# Altium PCB NanoEEG_v3.PcbDoc (part 1 of 2)
Units mm, origin at the board's own origin, x right, y up, seen from the top; angles counter-clockwise.
Board outline 66 x 52 mm, 4 copper layers (Top Layer, Gound Plane 1, Power Plane 1, Bottom Layer), stack 1.87 mm thick; 84 components, 86 nets, 411 pads, 232 vias.
Unrouted connection lines stored in the file: 20.
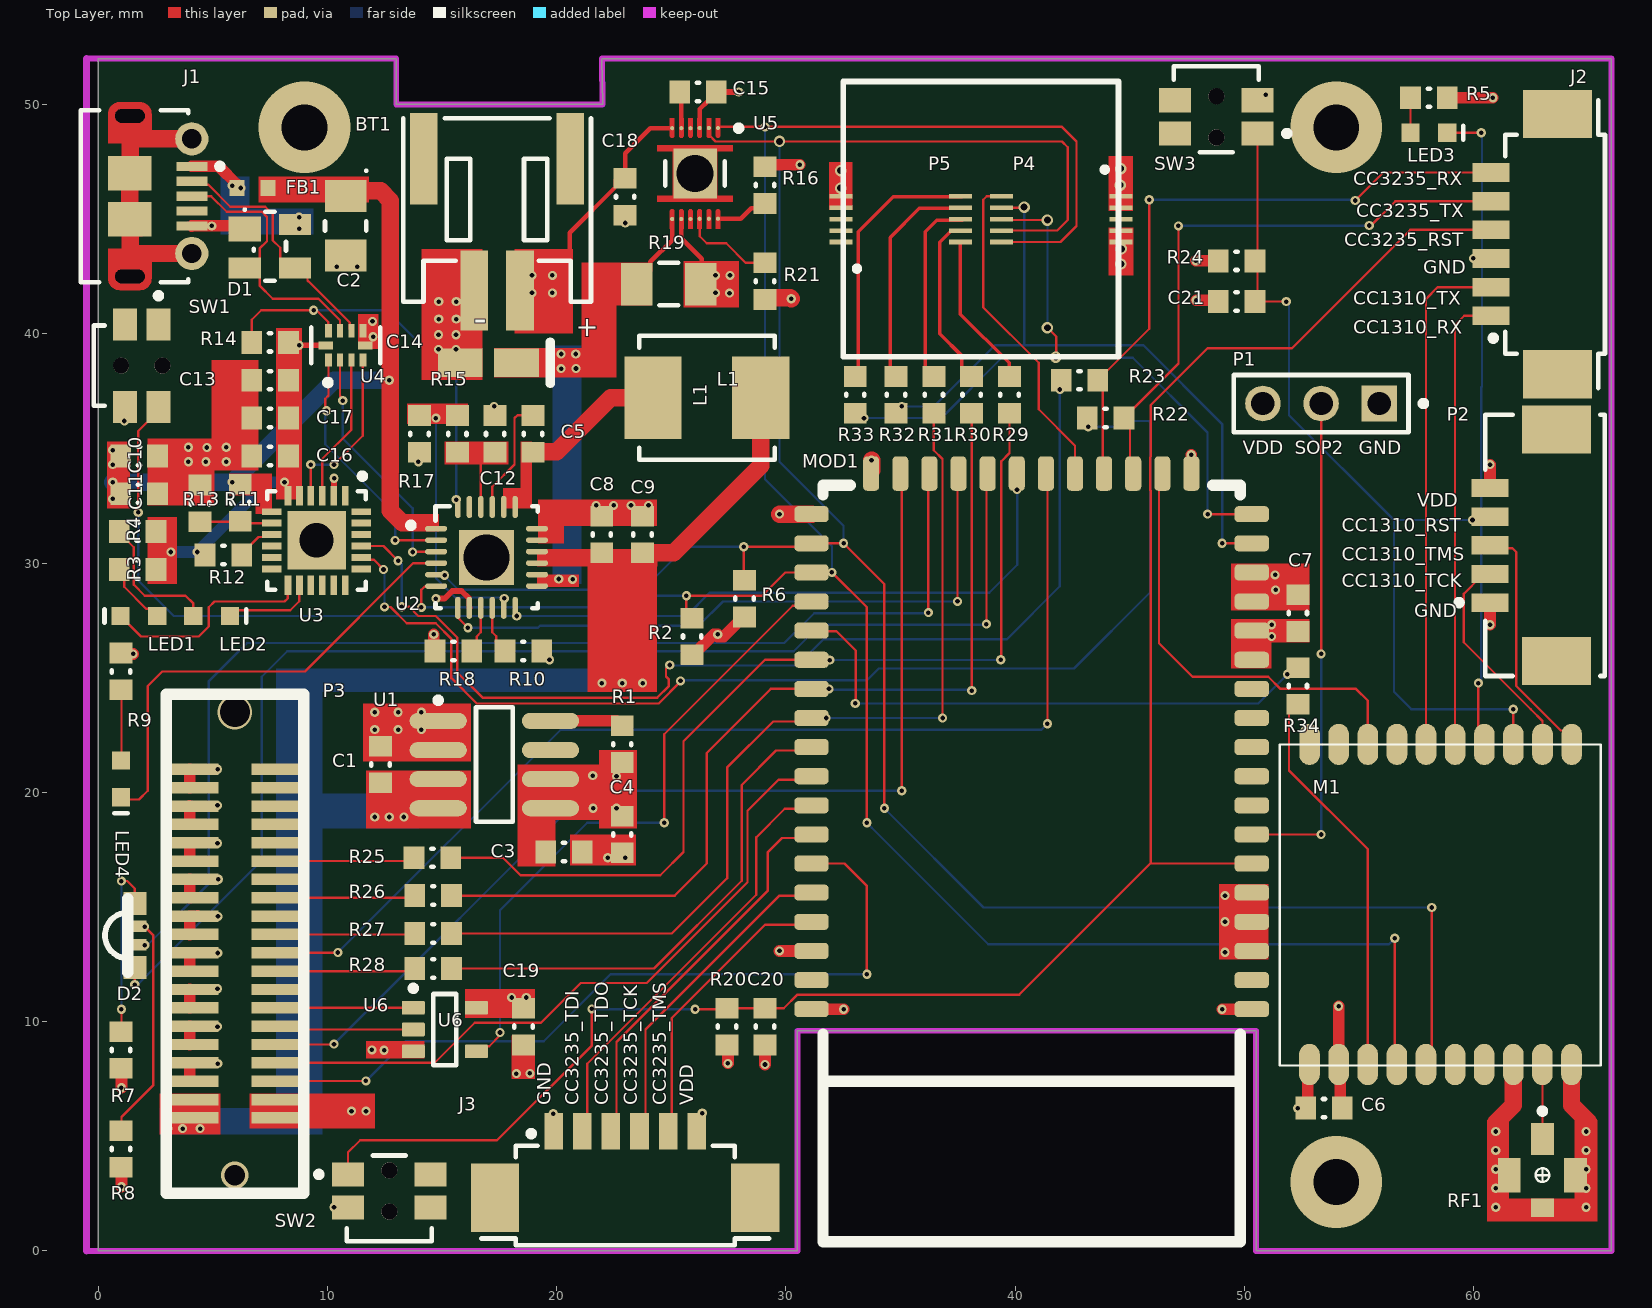
[diagram p0: Top Layer view]
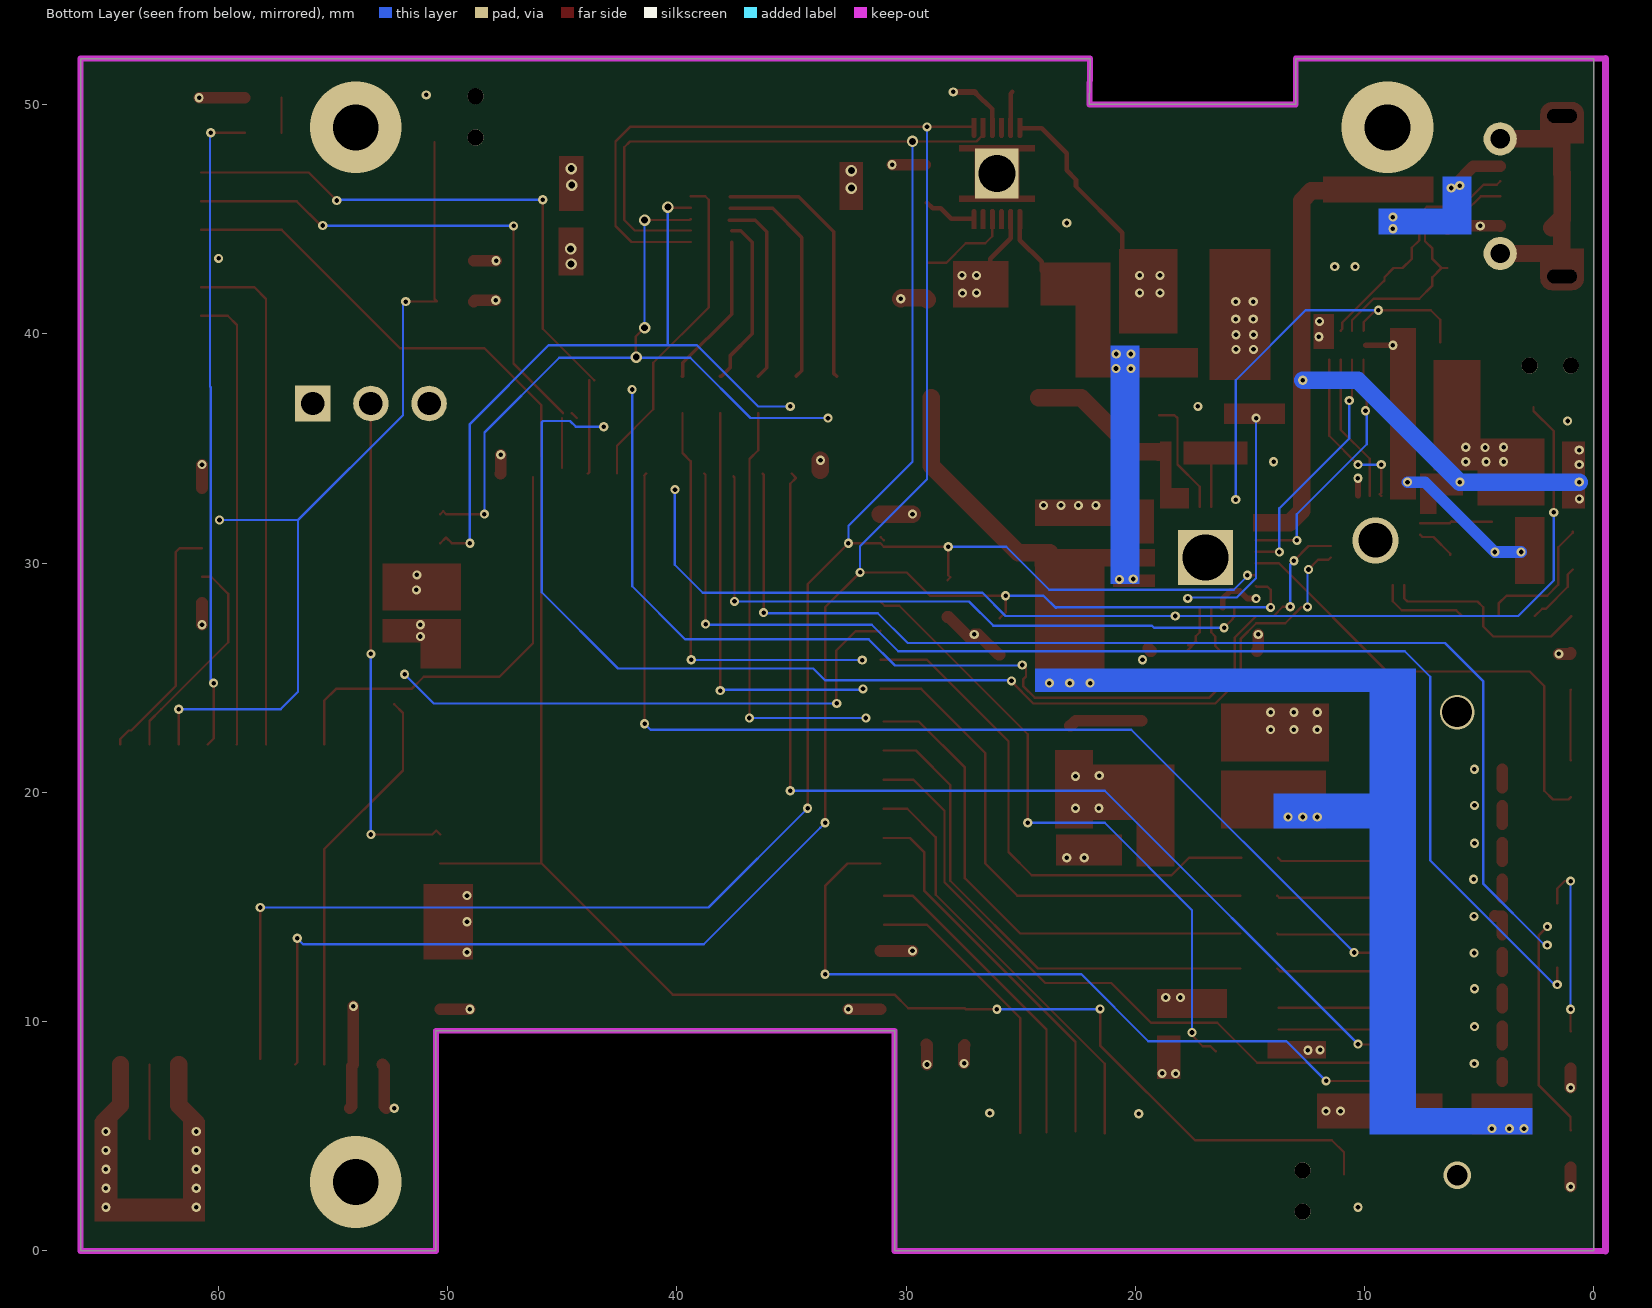
[diagram p1: Bottom Layer view, seen from below]
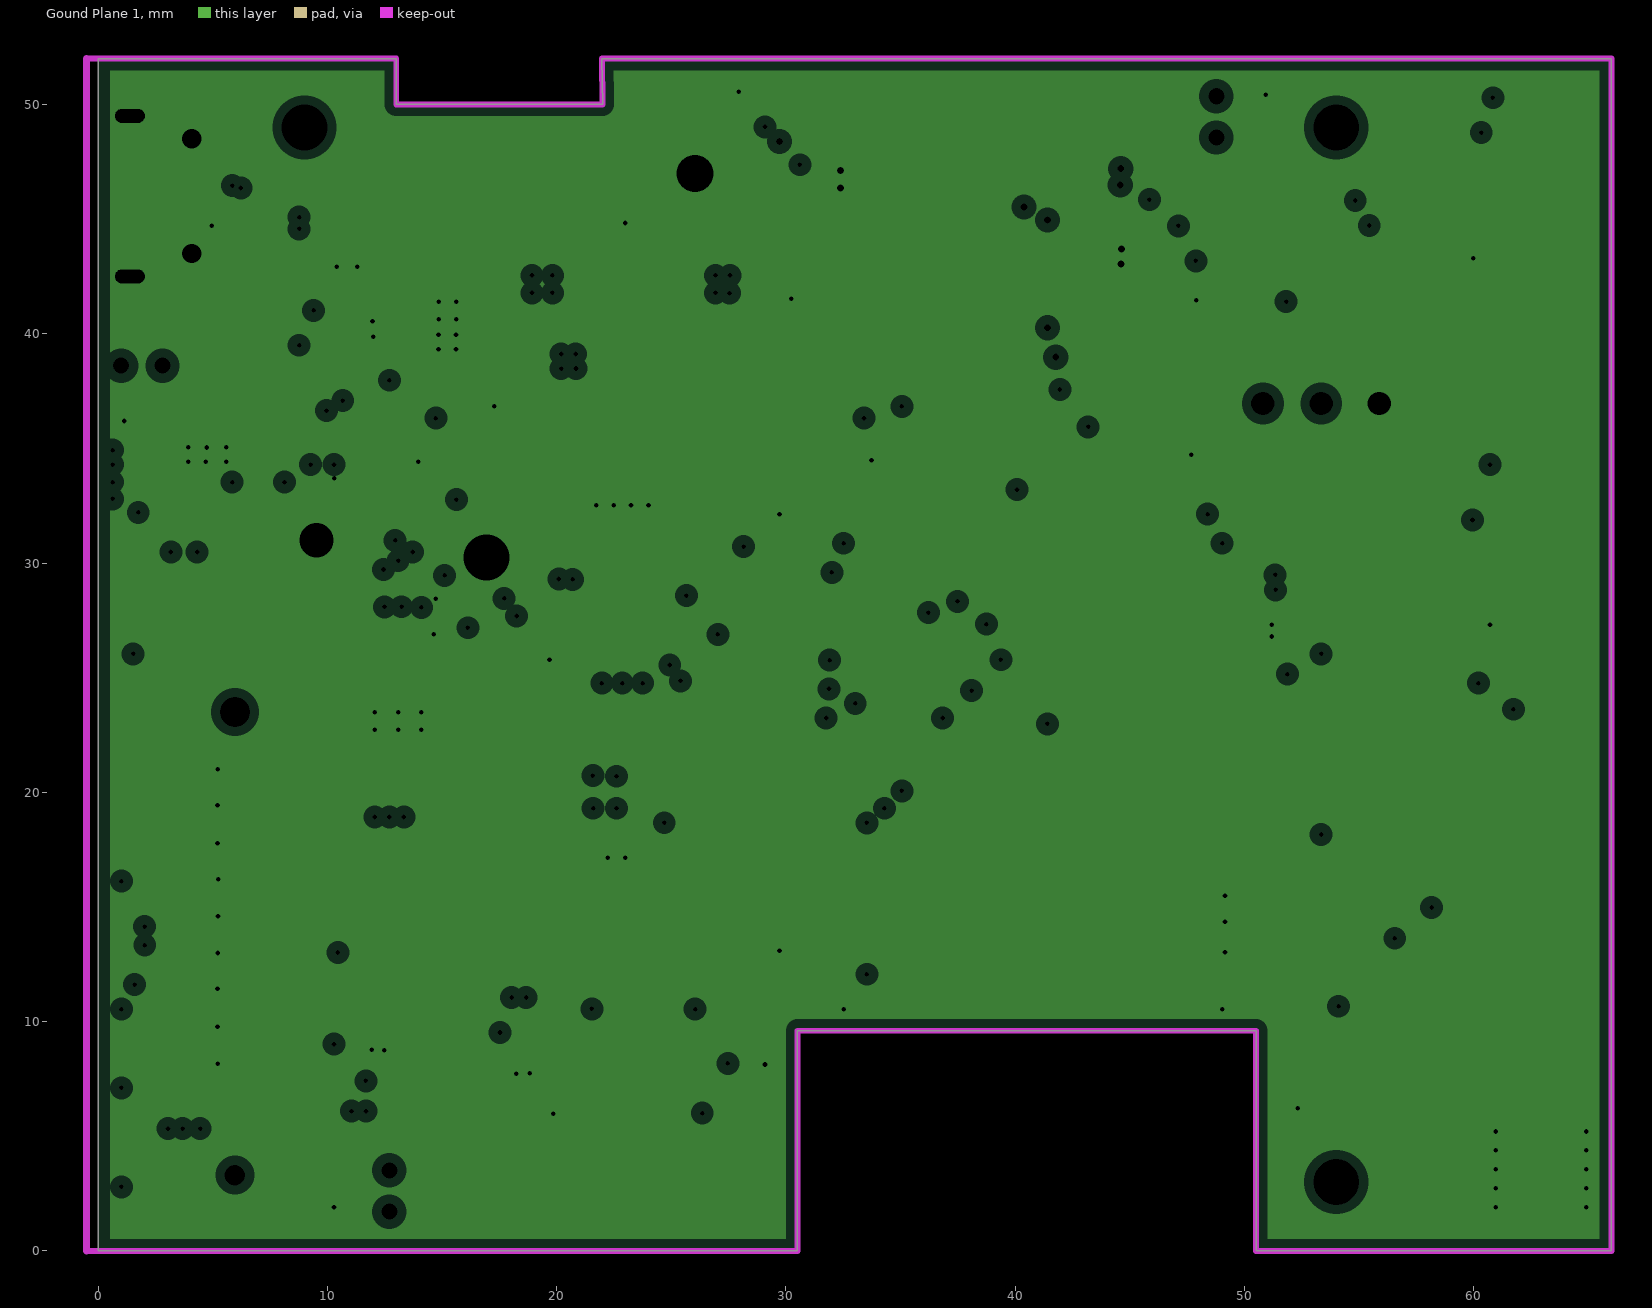
[diagram p2: Gound Plane 1, clearances drawn from the general rule]
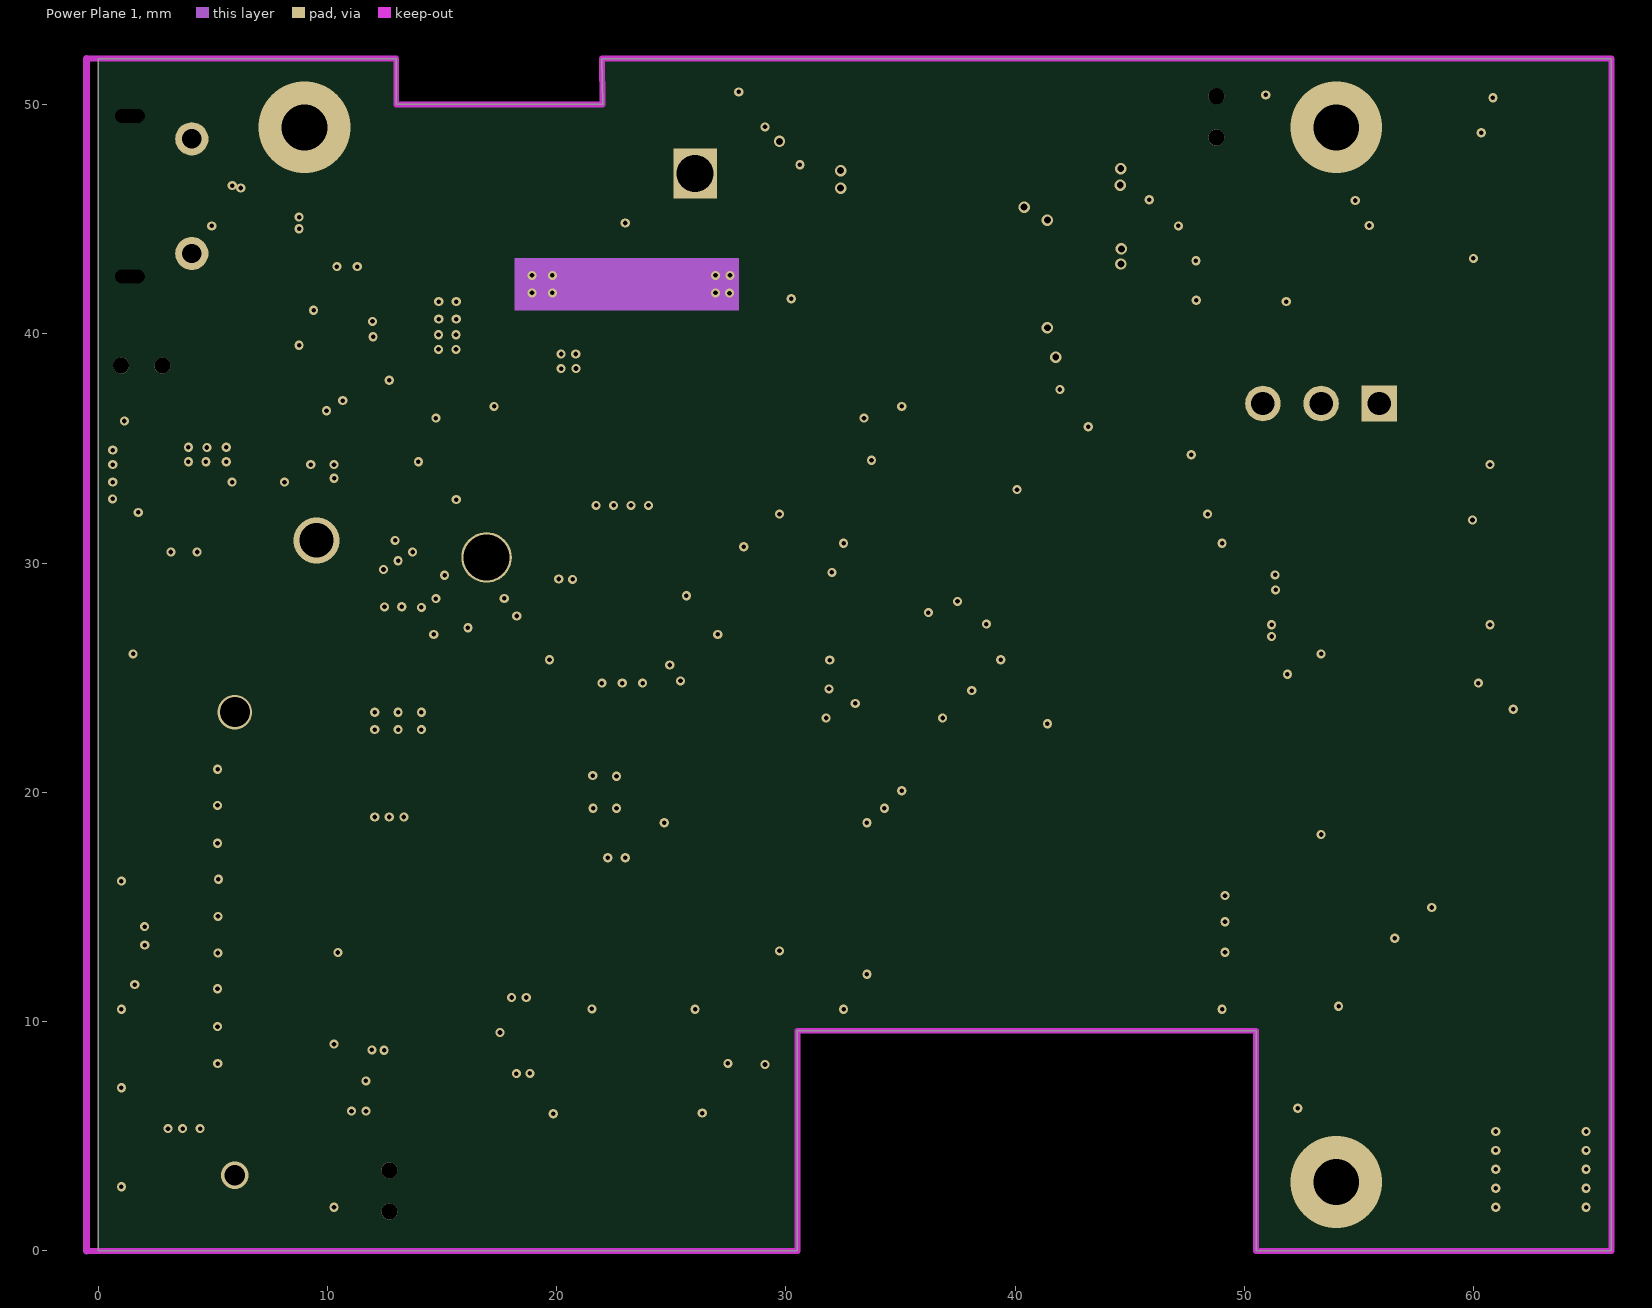
[diagram p3: Power Plane 1]

## Layer stack, top to bottom
Top Solder: solder mask 0.0102, Solder Resist, Dk 3.5
Top Layer: signal copper 0.0356
Dielectric 1: core 0.8, FR-4, Dk 4.8
Gound Plane 1: plane copper 0.036, net GND
Dielectric 3: prepreg 0.127, Dk 4.2
Power Plane 1: signal copper 0.036
Dielectric 2: core 0.8, FR-4, Dk 4.2
Bottom Layer: signal copper 0.0356
Bottom Solder: solder mask 0.0102, Solder Resist, Dk 3.5

## Board outline
0,0 0,52 13,52 13,50 22,50 21.971,52 42,52 66,52 66,0 50.5,0 50.5,9.6 30.5,9.6 30.5,0

## Design rules (kind name [scope] priority, off if disabled: settings)
Clearance [All] p1: gap=0.102 ignorepadtopadclearanceinfootprint=FALSE
HoleToHoleClearance [All] p1: gap=0 allowstackedmicrovias=TRUE
MinimumSolderMaskSliver [All] p1: minsoldermaskwidth=0
PlaneClearance [All] p1: clearance=0.4
PlaneConnect [All] p1: planeconnectstyle=Direct reliefexpansion=0.508 reliefentries=4 reliefconductorwidth=0.254 reliefairgap=0.254
PolygonConnect [All] p1: connectstyle=Relief reliefconductorwidth=0.254 reliefentries=4 polygonreliefangle="90 Angle" airgapwidth=0.254
RoutingVias [All] p1: holewidth=0.2 width=0.4 viastyle="Through Hole" minholewidth=0.2 minwidth=0.4 maxholewidth=0.2 maxwidth=0.4
SilkToSilkClearance [All] p1: silktosilkclearance=0
SilkToSolderMaskClearance [IsPad] p1: minsilkscreentomaskgap=0 clearancetoexposedcopper=TRUE
SolderMaskExpansion [All] p1: expansion=0.05 istentingtop=FALSE
UnRoutedNet [All] p1: checkbadconnections=TRUE
Width [InNetClass('SIGNAL')] p1: maxlimit=1.27 minlimit=0.09 preferedwidth=0.1
23 further rules are at their usual default settings.

## Components (designator, comment, footprint, x,y, rotation, side; value= is the part's Value field where it differs from the comment)
BT1 "Battery" PH2.0-WS-2P 17.399,47.625 r180 top
C1 "CAP 10uF 6.3V" CAPC0603(1608)100_N 12.319,21.209 r270 top value=10uF
C2 "TAJA106K016RNJ" CAPMP3217X18-T_V 10.795,44.704 r270 top
C3 "CAP 10uF 6.3V" CAPC0603(1608)100_N 20.32,17.399 r180 top value=10uF
C4 "CAP 100nF 6.3V" CAPC0603(1608)100_N 22.86,18.161 r90 top value=100nF
C5 "CAP 47nF" CAPC0603(1608)100_N 18.968,35.635 r270 top value=47nF
C6 "CAP 100nF 6.3V" CAPC0603(1608)100_N 53.467,6.223 r0 top value=100nF
C7 "CAP 100nF 6.3V" CAPC0603(1608)100_N 52.324,27.813 r90 top value=100nF
C8 "CAP 10uF" CAPC0603(1608)100_N 21.963,31.242 r270 top value=10uF
C9 "CAP 10uF" CAPC0603(1608)100_N 23.741,31.242 r270 top value=10uF
C10 "CAP 100nF 6.3V" CAPC0603(1608)100_N 1.786,34.671 r180 top value=100nF
C11 "CAP 4.7uF 6.3V" CAPC0603(1608)100_N 1.786,33.02 r180 top value=4.7uF
C12 "CAP 4.7uF 10V 0603(1608)" CAPC0603(1608)55_N 17.317,35.635 r90 top value=4.7uF
C13 "CAP 100nF 6.3V" CAPC0603(1608)100_N 7.501,37.973 r0 top value=100nF
C14 "T491A106K016AT" KEMT-A-3216-18-2_N 17.018,38.735 r180 top
C15 "CAP 470nF 10V" CAPC0603(1608)100_N 26.162,50.546 r180 top value=470nF
C16 "CAP 100nF 6.3V" CAPC0603(1608)100_N 7.501,34.671 r0 top value=100nF
C17 "CAP 4.7uF 6.3V" CAPC0603(1608)100_N 7.501,36.322 r0 top value=4.7uF
C18 "CAP 10uF 10V" CAPC0603(1608)100_N 22.987,45.974 r90 top value=1uF
C19 "CAP 100nF 6.3V" CAPC0603(1608)100_N 18.55,9.779 r90 top value=100nF
C20 "CAP 10uF 25V" CAPC0603(1608)100_N 29.083,9.779 r90 top value=1uF
C21 "CAP 1uF 25V 0603(1608)" CAPC0603(1608)100_N 49.657,41.402 r0 top value=1uF
D1 "SP0503BAHTG" LFUS-SOT143-4_V 7.493,43.815 r0 top
D2 "Bi-Color LED" LED_Bi_Color_1204 1.3,13.758 r180 top
FB1 "BLM18PG600SN1J" MURA-BLM18PG_KG-CHIP-2_V2 6.731,46.355 r180 top
J1 "105017-0001" USB-MICRO-B_V 2.735,46 r270 top locked
J2 "Header 6" GH-1.25-WS-6P 63.546,43.908 r90 top
J3 "Header 6" GH-1.25-WS-6P 22.987,2.413 r0 top
L1 "ETQ-P3M2R2YFP" FP-PCC-M0530M-MFG 26.551,37.211 r0 top value=2.2uH
LED1 "150060BS75000" 0603_A 1.778,27.686 r0 top
LED2 "150060BS75000" 0603_A 4.953,27.686 r180 top
LED3 "150060BS75000" 0603_A 58.039,48.768 r180 top
LED4 "150060BS75000" 0603_A 1,20.59 r90 top
M1 "CC1310-Module (Silicontrac)" CC1310ZTR4-GC 65.54,8.143 r180 top
MOD1 "TA3235S_UA_MOD" TA_3235S_UA_MOD 49.815,32.131 r180 top
P1 "22-28-4033" MOLX-22-28-4033_V 53.34,36.957 r180 top
P2 "53261-0571" MOLX-52361-0571-5_V 60.706,30.774 r90 top
P3 "Header 20X2" FCI-B2B-0.8mm-40p-MALE 4,5.8 r270 top locked
P4 "5*2 母座" "10PIN 母座" 42,45 r270 top locked
P5 "5*2 母座" "10PIN 母座" 35,45 r90 top locked
R1 "249K 1%" RESC0603(1608)_N 22.86,22.098 r270 top value="249000.00 Ohm"
R2 "4K7 1% 0603(1608)" RESC0603(1608)_N 25.908,26.797 r90 top value="4700.00 Ohm"
R3 "1K 1%" RESC0603(1608)_N 1.722,29.718 r0 top value="1000.00 Ohm"
R4 "1K 1%" RESC0603(1608)_N 1.722,31.369 r0 top value="1000.00 Ohm"
R5 "1K 1%" RESC0603(1608)_N 58.039,50.292 r0 top value="1000.00 Ohm"
R6 "10K 1% 0603(1608)" RESC0603(1608)_N 28.194,28.448 r90 top value="4700.00 Ohm"
R7 "1K 1%" RESC0603(1608)_N 1,8.763 r90 top value="1000.00 Ohm"
R8 "1K 1%" RESC0603(1608)_N 1,4.445 r90 top value="1000.00 Ohm"
R9 "1K 1%" RESC0603(1608)_N 1,25.273 r90 top value="1000.00 Ohm"
R10 "260" RESC0603(1608)_N 18.542,26.162 r180 top value="10500.00 Ohm"
R11 "27K 1%" RESC0603(1608)_N 6.198,32.629 r270 top value="1000.00 Ohm"
R12 "2K 1%" RESC0603(1608)_N 5.461,30.353 r180 top value="1000.00 Ohm"
R13 "33K 1%" RESC0603(1608)_N 4.445,32.601 r90 top value="1000.00 Ohm"
R14 "1K 1%" RESC0603(1608)_N 7.501,39.624 r180 top value="1000.00 Ohm"
R15 "10K" RESC0603(1608)_N 15.666,35.635 r90 top value="10500.00 Ohm"
R16 "10K 1%" RESC0603(1608)_N 29.083,46.482 r270 top value="10000.00 Ohm"
R17 "10K" RESC0603(1608)_N 14.015,35.635 r270 top value="10500.00 Ohm"
R18 "10K" RESC0603(1608)_N 15.494,26.162 r180 top value="10500.00 Ohm"
R19 "WSLP1206R0100FEA" FP-WSLP1206-FP_1_65x1_93x-IPC_B 24.892,42.164 r180 top
R20 "100K 1%" RESC0603(1608)_N 27.432,9.779 r270 top value="10000.00 Ohm"
R21 "1K 1%" RESC0603(1608)_N 29.083,42.291 r270 top value="10000.00 Ohm"
R22 "Jumper" RESC0603(1608)_N 43.942,36.322 r180 top value="0.00 Ohm"
R23 "Jumper" RESC0603(1608)_N 42.799,37.973 r180 top value="0.00 Ohm"
R24 "10K 1% 0603(1608)" RESC0603(1608)_N 49.657,43.18 r180 top value="10000.00 Ohm"
R25 "100R 1%" RESC0603(1608)_N 14.575,17.145 r180 top value="100.00 Ohm"
R26 "100R 1%" RESC0603(1608)_N 14.613,15.494 r180 top value="100.00 Ohm"
R27 "100R 1%" RESC0603(1608)_N 14.613,13.843 r180 top value="100.00 Ohm"
R28 "100R 1%" RESC0603(1608)_N 14.613,12.319 r180 top value="100.00 Ohm"
R29 "100R 1%" RESC0603(1608)_N 39.751,37.338 r270 top value="100.00 Ohm"
R30 "100R 1%" RESC0603(1608)_N 38.1,37.338 r270 top value="100.00 Ohm"
R31 "100R 1%" RESC0603(1608)_N 36.449,37.338 r270 top value="100.00 Ohm"
R32 "100R 1%" RESC0603(1608)_N 34.798,37.338 r270 top value="100.00 Ohm"
R33 "100R 1%" RESC0603(1608)_N 33.02,37.338 r270 top value="100.00 Ohm"
R34 "100K" RESC0603(1608)_N 52.324,24.638 r90 top value="10500.00 Ohm"
RF1 "RECE-20369-001E-01" IPEX_MHF_I 62.992,3.302 r180 top
SW1 "EVQ-P7D01K" FP-EVQ-P7D01K-MFG 1.905,38.608 r270 top
SW2 "EVQ-P7D01P" FP-EVQ-P7D01P-MFG 12.7,2.286 r0 top
SW3 "EVQ-P7D01P" FP-EVQ-P7D01P-MFG 48.768,49.784 r180 top
U1 "TPS76833QDG4" TI-D8_M 17.28,21.209 r0 top locked
U2 "BQ25895RTWR" RTW0024H 16.94,30.246 r0 top value=Value
U3 "CP2102N-A01-GQFN24" SLAB-QFN-24-2550x2550TP_A_V 9.525,30.988 r270 top
U4 "TS3USB3000RSER" FP-TS3USB3000RSER-MFG 10.795,39.497 r90 top
U5 "BQ27441DRZR-G1A" FP-DRZ0012A-MFG_M 26.035,46.99 r180 top
U6 "SN74AHC1G32DBVR" DBV0005A_N 15.121,9.652 r0 top

## Footprints (in the part's own frame and the unit in brackets; to place one, negate y for a bottom-side part, rotate by r counter-clockwise, add the part's x,y. Pads: shape width x height; smd on the part's side, far side on the other; paste and mask are expansions set on the pad)
"10PIN 母座" [mm] "0.5间距，合高1.5，2.5，3.5"
  rect 0.2x1 smd: 1(-1,2.605) 2(-0.5,2.605) 3(0,2.605) 4(0.5,2.605) 5(1,2.605) 6(-1,-2.605) 7(-0.5,-2.605) 8(0,-2.605) 9(0.5,-2.605) 10(1,-2.605)
  silkscreen extent -2.26,1.81 -2.06,2
0603_A [mm] "Chip LED, 2-Leads, Body 1.6x0.8mm, IPC Medium Density"
  rect 0.8x0.8 smd: 1(-0.8,0) 2(0.8,0)
  silkscreen extent -1.5,-0.3 -1.5,0.3, body extent -0.8,-0.4 0.8,0.4, height 0.7
CAPC0603(1608)55_N [mm] "Chip Capacitor, Body 1.6x0.8mm, Height 0.55mm, IPC Medium Density"
  rect 0.9x1 smd: 1(-0.8,0) 2(0.8,0)
  silkscreen extent -0.05,-0.4 0.05,0.4, body extent -0.87,-0.48 0.88,0.47, height 0.55
CAPC0603(1608)100_N [mm] "Chip Capacitor, Body 1.6x0.8mm, Height 1.0mm, IPC Medium Density"
  rect 0.9x1 smd: 1(-0.8,0) 2(0.8,0)
  silkscreen extent -0.05,-0.4 0.05,0.4, body extent -0.87,-0.48 0.88,0.47, height 1
CAPMP3217X18-T_V [mm] "Molded Capacitor, 2-Leads, Body 3.40x1.8mm"
  rect 1.4x1.8 smd: 1(-1.3,0) 2(1.3,0)
  silkscreen extent -2.45,-0.9 0.2,0.95, body extent -1.92,-0.9 1.92,0.9, height 1.8
CC1310ZTR4-GC [mm]
  oval 0.9x1.8 smd: 1(1.27,-13.945) 2(2.544,-13.945) 3(3.814,-13.945) 4(5.084,-13.945) 5(6.354,-13.945) 6(7.624,-13.945) 7(8.894,-13.945) 8(10.164,-13.945) 9(11.434,-13.945) 10(12.704,-13.945) 11(12.708,0.015) 12(11.438,0.015) 13(10.168,0.015) 14(8.898,0.015) 15(7.628,0.015) 16(6.358,0.015) 17(5.088,0.015) 18(3.818,0.015) 19(2.548,0.015) 20(1.28,0.015)
  silkscreen extent 0,-13.94 14,0.06
DBV0005A_N [mm] "SOT23, 5-Leads, Body 3.05x1.75mm, Pitch 0.95mm, IPC Medium Density"
  rrect17% 1x0.6 smd: 1(-1.375,0.95) 2(-1.375,0) 3(-1.375,-0.95) 4(1.375,-0.95) 5(1.375,0.95)
  silkscreen extent -1.5,-1.55 0.5,1.92, body extent -1.42,-1.46 1.42,1.46, height 1.08
FCI-B2B-0.8mm-40p-MALE [mm]
  rect 0.5x2.5 smd: 1(0,0) 1(0,0) 2(0,3.93) 2(0,3.93) 3(-0.8,0) 4(-0.8,3.93) 5(-1.6,0) 6(-1.6,3.93) 7(-2.4,0) 8(-2.4,3.93) 9(-3.2,0) 10(-3.2,3.93) 11(-4,0) 12(-4,3.93) 13(-4.8,0) 14(-4.8,3.93) 15(-5.6,0) 16(-5.6,3.93) 17(-6.4,0) 18(-6.4,3.93) 19(-7.2,0) 20(-7.2,3.93) 21(-8,0) 22(-8,3.93) 23(-8.8,0) 24(-8.8,3.93) 25(-9.6,0) 26(-9.6,3.93) 27(-10.4,0) 28(-10.4,3.93) 29(-11.2,0) 30(-11.2,3.93) 31(-12,0) 32(-12,3.93) 33(-12.8,0) 34(-12.8,3.93) 35(-13.6,0) 36(-13.6,3.93) 37(-14.4,0) 38(-14.4,3.93) 39(-15.2,0) 40(-15.2,3.93)
  silkscreen extent -18.48,-1.03 3.28,4.96, body extent -18.5,-1.03 3.3,4.96, height 5.6
FP-DRZ0012A-MFG_M [mm]
  round 0.18 smd paste-1000 mask+0: 1(-1,-1.985) 2(-0.6,-1.985) 3(-0.2,-1.985) 4(0.2,-1.975) 5(0.6,-1.975) 6(1,-1.975) 7(1,1.985) 8(0.6,1.985) 9(0.2,1.985) 10(-0.2,1.975) 11(-0.6,1.975) 12(-1,1.975)
  rect 1.9x2.2 hole 1.6: 13(0,0)
  Top Layer region: -0.9,2.4 -0.9,1.65 -0.9,1.63 -0.915,1.593 -0.943,1.565 -0.98,1.55 -1,1.55 -1.02,1.55 -1.057,1.565 -1.085,1.593 -1.1,1.63 -1.1,1.65 -1.1,1.65 -1.1,2.4
  Top Layer region: -0.5,2.4 -0.5,1.65 -0.5,1.63 -0.515,1.593 -0.543,1.565 -0.58,1.55 -0.6,1.55 -0.62,1.55 -0.657,1.565 -0.685,1.593 -0.7,1.63 -0.7,1.65 -0.7,1.65 -0.7,2.4
  Top Layer region: -0.1,2.4 -0.1,1.65 -0.1,1.63 -0.115,1.593 -0.143,1.565 -0.18,1.55 -0.2,1.55 -0.22,1.55 -0.257,1.565 -0.285,1.593 -0.3,1.63 -0.3,1.65 -0.3,1.65 -0.3,2.4
  Top Layer region: 0.3,2.4 0.3,1.65 0.3,1.63 0.285,1.593 0.257,1.565 0.22,1.55 0.2,1.55 0.18,1.55 0.143,1.565 0.115,1.593 0.1,1.63 0.1,1.65 0.1,1.65 0.1,2.4
  Top Layer region: 0.7,2.4 0.7,1.65 0.7,1.63 0.685,1.593 0.657,1.565 0.62,1.55 0.6,1.55 0.58,1.55 0.543,1.565 0.515,1.593 0.5,1.63 0.5,1.65 0.5,1.65 0.5,2.4
  Top Layer region: 1.1,2.4 1.1,1.65 1.1,1.63 1.085,1.593 1.057,1.565 1.02,1.55 1,1.55 0.98,1.55 0.943,1.565 0.915,1.593 0.9,1.63 0.9,1.65 0.9,1.65 0.9,2.4
  Top Layer region: 0.9,-2.4 0.9,-1.65 0.9,-1.63 0.915,-1.593 0.943,-1.565 0.98,-1.55 1,-1.55 1.02,-1.55 1.057,-1.565 1.085,-1.593 1.1,-1.63 1.1,-1.65 1.1,-1.65 1.1,-2.4
  Top Layer region: 0.5,-2.4 0.5,-1.65 0.5,-1.63 0.515,-1.593 0.543,-1.565 0.58,-1.55 0.6,-1.55 0.62,-1.55 0.657,-1.565 0.685,-1.593 0.7,-1.63 0.7,-1.65 0.7,-1.65 0.7,-2.4
  Top Layer region: 0.1,-2.4 0.1,-1.65 0.1,-1.63 0.115,-1.593 0.143,-1.565 0.18,-1.55 0.2,-1.55 0.22,-1.55 0.257,-1.565 0.285,-1.593 0.3,-1.63 0.3,-1.65 0.3,-1.65 0.3,-2.4
  Top Layer region: -0.3,-2.4 -0.3,-1.65 -0.3,-1.63 -0.285,-1.593 -0.257,-1.565 -0.22,-1.55 -0.2,-1.55 -0.18,-1.55 -0.143,-1.565 -0.115,-1.593 -0.1,-1.63 -0.1,-1.65 -0.1,-1.65 -0.1,-2.4
  Top Layer region: -0.7,-2.4 -0.7,-1.65 -0.7,-1.63 -0.685,-1.593 -0.657,-1.565 -0.62,-1.55 -0.6,-1.55 -0.58,-1.55 -0.543,-1.565 -0.515,-1.593 -0.5,-1.63 -0.5,-1.65 -0.5,-1.65 -0.5,-2.4
  Top Layer region: -1.1,-2.4 -1.1,-1.65 -1.1,-1.63 -1.085,-1.593 -1.057,-1.565 -1.02,-1.55 -1,-1.55 -0.98,-1.55 -0.943,-1.565 -0.915,-1.593 -0.9,-1.63 -0.9,-1.65 -0.9,-1.65 -0.9,-2.4
  Top Layer region: -1.65,1.225 1.65,1.225 1.65,0.975 0.975,0.975 0.975,-0.975 1.65,-0.975 1.65,-1.225 -1.65,-1.225 -1.65,-0.975 -0.975,-0.975 -0.975,0.975 -1.65,0.975 -1.65,1.225
  silkscreen extent -2.02,-2.1 1.3,0.53, body extent -1.75,-2.5 1.75,2.5, height 0.25
FP-EVQ-P7D01K-MFG [mm]
  rect 1.4x1.05 smd paste+0 mask+0: 1(-1.8,0.725) 1'(1.8,0.725) 2(-1.8,-0.725) 2'(1.8,-0.725)
  round 0.7 hole 0.7 unplated paste-1000 mask+0: ""(0,0.9) ""(0,-0.9)
  silkscreen extent -3.17,-2.1 1.75,0.85, body extent -2.6,-2.2 2.6,1.55, height 0.25
FP-EVQ-P7D01P-MFG [mm]
  rect 1.4x1.05 smd paste+0 mask+0: 1(-1.8,1.05) 1'(1.8,1.05) 2(-1.8,-0.4) 2'(1.8,-0.4)
  round 0.7 hole 0.7 unplated: ""(0,-0.575) ""(0,1.225)
  silkscreen extent -3.2,-1.88 1.85,1.88, body extent -2.6,-1.97 2.6,1.97, height 0.25
FP-PCC-M0530M-MFG [mm]
  rect 2.5x3.6 smd paste+0 mask+0: 1(-2.35,0) 2(2.35,0)
  silkscreen extent -2.95,-2.7 2.95,2.7, body extent -3.7,-2.8 3.7,2.8, height 0.25
FP-TS3USB3000RSER-MFG [mm]
  rect 0.575x0.3 smd paste-1000 mask+0: 1(-0.637,0.75) 4(-0.637,-0.75) 6(0.637,-0.75) 9(0.637,0.75)
  rect 0.575x0.25 smd paste-1000 mask+0: 2(-0.637,0.25) 3(-0.637,-0.25) 7(0.637,-0.25) 8(0.637,0.25)
  rect 0.35x0.63 smd paste-1000 mask+0: 5(0,-0.86) 10(0,0.86)
  silkscreen extent -1.75,-1.5 0.77,1.5, body extent -1.02,-1.28 1.02,1.28, height 0.25
FP-WSLP1206-FP_1_65x1_93x-IPC_B [mm]
  rect 1.37x1.859 smd paste+0 mask+0: 1(-1.395,0) 2(1.395,0)
  silkscreen extent -0.41,-0.93 0.41,0.93, body extent -2.33,-1.18 2.33,1.18, height 0.25
GH-1.25-WS-6P [mm]
  rect 0.81x1.6 smd: 1(-3.125,2.8) 2(-1.875,2.8) 3(-0.625,2.8) 4(0.625,2.8) 5(1.875,2.8) 6(3.125,2.8)
  rect 2.1x3 smd: MP1(-5.675,-0.1) MP2(5.675,-0.1)
  silkscreen extent -6.27,-2.17 6.27,2.82, body extent -6.13,-2.1 6.13,3.3, height 3.4
IPEX_MHF_I [mm]
  rect 1x1.4 smd: 1(0,-1.575)
  rect 1x1.5 smd: 2(1.448,0) 3(-1.448,0)
  rect 1x0.8 smd: 4(0,1.422)
  silkscreen extent -0.3,-2.92 0.3,0.3, body extent -0.85,-0.85 0.85,0.85, height 0.85
KEMT-A-3216-18-2_N [mm] "Molded TAN Capacitor, 2-Leads, Body 3.4x1.8mm, IPC Medium Density"
  rect 1.95x1.25 smd: 1(-1.225,0) 2(1.225,0)
  silkscreen extent -2.7,-0.9 -2.7,0.9, body extent -1.7,-0.9 1.7,0.9, height 1.8
LED_Bi_Color_1204 [mm]
  rect 1x0.5 smd: 1(-0.3,0.4) 2(-0.3,-0.4)
  rect 1x1 smd: 3(-0.3,1.4) 4(-0.3,-1.4)
  silkscreen extent 0,-1.6 1,1.6, body extent -0.25,-1.6 1,1.6, height 1
LFUS-SOT143-4_V [mm] "SOT143, 4-Leads, Body 3.04x1.4mm, Pitch 1.90mm"
  rect 1.4x1.1 smd: 1(-1.1,0.75)
  rect 1.4x0.9 smd: 2(-1.1,-0.95) 3(1.1,-0.95) 4(1.1,0.95)
  silkscreen extent -1.15,-1.5 0.7,1.65, body extent -0.7,-1.52 0.7,1.52, height 1.22
MOLX-22-28-4033_V [mm] "THD, 3-Leads, Body 7.62x2.49mm, Pitch 2.54mm"
  rect 1.55x1.55 hole 1.02: 1(-2.54,0)
  round 1.55 hole 1.02: 2(0,0) 3(2.54,0)
  silkscreen extent -4.59,-1.24 3.81,1.24, body extent -3.81,-1.24 3.81,1.24, height 8.38
MOLX-52361-0571-5_V [mm] "SMD, 5-Leads, Body 11.4x5.2mm, Pitch 1.25mm"
  rect 0.8x1.6 smd: 1(-2.5,0) 2(-1.25,0) 3(0,0) 4(1.25,0) 5(2.5,0)
  rect 2.1x3 smd: MP1(-5.05,-2.9) MP2(5.05,-2.9)
  silkscreen extent -5.7,-5 5.7,1.47, body extent -5.7,-5 5.7,0.2, height 3.4
MURA-BLM18PG_KG-CHIP-2_V2 [mm] "Chip Ferrite Bead, 2-Leads, Body 1.6x0.8mm, Height 0.95mm, Reflow, 0.5 to 1.5A Rated Current"
  rect 0.65x0.7 smd: 1(-0.675,0) 2(0.675,0)
  body extent -0.8,-0.4 0.8,0.4, height 0.95
PH2.0-WS-2P [mm]
  rect 1.2x4 smd: 0(-3.2,-0.006) 0(3.2,-0.006)
  rect 1.2x3.5 smd: 1(-1,5.744) 2(1,5.744)
  silkscreen extent -4.1,-1.78 4.1,6.22, body extent -4,-1.65 4,6.95, height 5.55
RESC0603(1608)_N [mm] "Chip Resistor, Body 1.6x0.8mm, IPC Medium Density"
  rect 0.9x1 smd: 1(-0.8,0) 2(0.8,0)
  silkscreen extent -0.05,-0.4 0.05,0.4, body extent -0.85,-0.47 0.85,0.47, height 0.6
RTW0024H [mm]
  oval 0.965x0.24 smd paste+0 mask+0.051: 1(-2.2,1.25) 2(-2.2,0.75) 3(-2.2,0.25) 4(-2.2,-0.25) 5(-2.2,-0.75) 6(-2.2,-1.25) 13(2.2,-1.25) 14(2.2,-0.75) 15(2.2,-0.25) 16(2.2,0.25) 17(2.2,0.75) 18(2.2,1.25)
  oval 0.24x0.965 smd paste+0 mask+0.051: 7(-1.25,-2.2) 8(-0.75,-2.2) 9(-0.25,-2.2) 10(0.25,-2.2) 11(0.75,-2.2) 12(1.25,-2.2) 19(1.25,2.2) 20(0.75,2.2) 21(0.25,2.2) 22(-0.25,2.2) 23(-0.75,2.2) 24(-1.25,2.2)
  rect 2.4x2.4 smd paste-1.337 mask+0.051: 25(0,0)
  round 2.2 hole 2: 25(0,0)
  rect 2.4x2.4 smd far side paste-1.337 mask+0.051: 25(0,0)
  silkscreen extent -3.43,-2.22 2.22,2.22, body extent -1.84,-1.84 1.84,1.84, height 0.8
SLAB-QFN-24-2550x2550TP_A_V [mm]
  rect 0.85x0.3 smd: 1(-1.95,1.25) 2(-1.95,0.75) 3(-1.95,0.25) 4(-1.95,-0.25) 5(-1.95,-0.75) 6(-1.95,-1.25) 13(1.95,-1.25) 14(1.95,-0.75) 15(1.95,-0.25) 16(1.95,0.25) 17(1.95,0.75) 18(1.95,1.25)
  rect 0.3x0.85 smd: 7(-1.25,-1.95) 8(-0.75,-1.95) 9(-0.25,-1.95) 10(0.25,-1.95) 11(0.75,-1.95) 12(1.25,-1.95) 19(1.25,1.95) 20(0.75,1.95) 21(0.25,1.95) 22(-0.25,1.95) 23(-0.75,1.95) 24(-1.25,1.95)
  rect 2.55x2.55 smd: 25(0,0)
  silkscreen extent -2.92,-2.15 2.15,2.15, body extent -2,-2 2,2, height 0.8
TA_3235S_UA_MOD [mm]
  rrect50% 1.5x0.7 smd: 1(-0.5,21.59) 2(-0.5,20.32) 3(-0.5,19.05) 4(-0.5,17.78) 5(-0.5,16.51) 6(-0.5,15.24) 7(-0.5,13.97) 8(-0.5,12.7) 9(-0.5,11.43) 10(-0.5,10.16) 11(-0.5,8.89) 12(-0.5,7.62) 13(-0.5,6.35) 14(-0.5,5.08) 15(-0.5,3.81) 16(-0.5,2.54) 17(-0.5,1.27) 18(-0.5,0) 31(18.7,0) 32(18.7,1.27) 33(18.7,2.54) 34(18.7,3.81) 35(18.7,5.08) 36(18.7,6.35) 37(18.7,7.62) 38(18.7,8.89) 39(18.7,10.16) 40(18.7,11.43) 41(18.7,12.7) 42(18.7,13.97) 43(18.7,15.24) 44(18.7,16.51) 45(18.7,17.78) 46(18.7,19.05) 47(18.7,20.32) 48(18.7,21.59)
  rrect50% 0.7x1.5 smd: 19(2.13,-1.77) 20(3.4,-1.77) 21(4.67,-1.77) 22(5.94,-1.77) 23(7.21,-1.77) 24(8.48,-1.77) 25(9.75,-1.77) 26(11.02,-1.77) 27(12.29,-1.77) 28(13.56,-1.77) 29(14.83,-1.77) 30(16.1,-1.77)
  silkscreen extent 0,-1.27 18.2,31.73
TI-D8_M [mm] "SOIC, 8-Leads, Body 4.9x3.9mm, Pitch 1.27mm, IPC Low Density"
  oval 2.5x0.7 smd: 1(-2.45,1.905) 2(-2.45,0.635) 3(-2.45,-0.635) 4(-2.45,-1.905) 5(2.45,-1.905) 6(2.45,-0.635) 7(2.45,0.635) 8(2.45,1.905)
  silkscreen extent -2.57,-2.5 0.8,2.93, body extent -2,-2.5 2,2.5, height 1.75
USB-MICRO-B_V [mm] "USB, MICRO B, Body 7.491x4.695 mm, Pitch 0.65 mm"
  rect 0.4x1.35 smd: 1(-1.3,1.35) 2(-0.65,1.35) 3(0,1.35) 4(0.65,1.35) 5(1.3,1.35)
  round 1.45 hole 0.85: 6(-2.5,1.35) 7(2.5,1.35)
  rrect50% 0x0 hole 0.6 slot 1.3 at 90 deg: 8(-3.5,-1.35) 11(3.5,-1.35)
  rect 1.5x1.9 smd: 9(-1,-1.35) 10(1,-1.35)
  Top Layer circle w0.5: c-3.6,-1.8 r0.25
  Top Layer circle w0.5: c-3.6,-0.9 r0.25
  Top Layer circle w0.5: c3.6,-1.8 r0.25
  Top Layer circle w0.5: c3.6,-0.9 r0.25
  Top Layer region: -3.6,-1.8 -3.6,-0.9 -4.1,-0.9 -4.1,-1.8
  Top Layer region: 3.6,-0.9 3.6,-1.8 4.1,-1.8 4.1,-0.9
  Top Layer region: 2.3,-0.4 2.3,-2.3 3.6,-2.3 3.6,-0.4
  Top Layer region: -2.3,-2.3 -2.3,-0.4 -3.6,-0.4 -3.6,-2.3
  silkscreen extent -3.75,-3.5 3.75,2.7, body extent -4.1,-3.9 4.1,1.5, height 2.67

## Part data
BT1: "Multicell Battery", LatestRevisionDate=17-Jul-2002, LatestRevisionNote="Re-released for DXP Platform.", PackageDescription="Battery; 2 Leads", PackageReference=BAT-2, Published=24-Mar-1999, Publisher="Altium Limited"
C1 C3: library part CMP-1035-02796-1, "CAP 10uF 6.3V ±10% 0603 (1608 Metric) Thickness 1mm SMD", Case-EIA=0603, Case-Metric=1608, Rated Voltage="6.3 V", Tolerance=Â±10%, Max Thickness="1 mm", Technology=SMT
C2: library part CMP-1661-00004-1, "Standard Tantalum, 10 uF, +/- 10%, 16 V, -55 to 125 degC, 2-Pin SMD (1206), RoHS, Tape and Reel", Case\Package=SOT-26, Frequency="300 MHz", Max Operating Temperature="150 degC", Max Power Dissipation="300 mW", Min Operating Temperature="-55 degC", Package Quantity=3000, ComponentLink1Description="Manufacturer URL", ComponentLink1URL=http://www.avx.com/, ComponentLink2Description=Datasheet, ComponentLink2URL=http://datasheets.avx.com/TAJ.pdf, ComponentLink3Description="Package Specification", ComponentLink3URL=http://www.avx.com/download/software/literature/AVX-Footprint-Library.pdf, DatasheetVersion=Feb-16, Elements=2, Height="1.3 mm", hFE Min=60, Length="3.1 mm", Mount="Surface Mount", PackageDescription="2-Pin Surface Mount Device, Body 3.2 x 1.65 mm", PackageReference=CAPMP3217X18-T, Packaging="Tape and Reel", Pins=6, Radiation Hardening=No, REACH SVHC="No SVHC", RoHSCompliant=true, Vce Max="500 mV", Width="1.7 mm"
C4 C6 C7 C19: library part CMP-1035-02576-1, "CAP 100nF 6.3V ±10% 0603 (1608 Metric) Thickness 1mm SMD", Case-EIA=0603, Case-Metric=1608, Rated Voltage="6.3 V", Tolerance=Â±10%, Max Thickness="1 mm", Technology=SMT
C5: library part CMP-1035-02503-1, "CAP 47nF 16V ±10% 0603 (1608 Metric) Thickness 1mm SMD", Case-EIA=0603, Case-Metric=1608, Rated Voltage="16 V", Tolerance=Â±10%, Max Thickness="1 mm", Technology=SMT
C8 C9: library part CMP-1035-02799-1, "CAP 10uF 10V ±10% 0603 (1608 Metric) Thickness 1mm SMD", Case-EIA=0603, Case-Metric=1608, Rated Voltage="10 V", Tolerance=Â±10%, Max Thickness="1 mm", Technology=SMT
C10 C13 C16: library part CMP-1035-02575-1, "CAP 100nF 6.3V ±5% 0603 (1608 Metric) Thickness 1mm SMD", Case-EIA=0603, Case-Metric=1608, Rated Voltage="6.3 V", Tolerance=Â±5%, Max Thickness="1 mm", Technology=SMT
C11 C17: library part CMP-1035-02782-1, "CAP 4.7uF 6.3V ±20% 0603 (1608 Metric) Thickness 1mm SMD", Case-EIA=0603, Case-Metric=1608, Rated Voltage="6.3 V", Tolerance=Â±20%, Max Thickness="1 mm", Technology=SMT
C12: library part CMP-1035-02786-1, "CAP 4.7uF 10V ±20% 0603 (1608 Metric) Thickness 0.55mm SMD", Case-EIA=0603, Case-Metric=1608, Rated Voltage="10 V", Tolerance=Â±20%, Max Thickness="0.55 mm", Technology=SMT
C14: library part CMP-2000-05173-1, "Capacitor, Tantalum, 10 uF, +/- 10%, 16 V, -55 to 125 degC, 2-Pin SMD (1206), RoHS, Tape and Reel", Capacitance=10uF, Case Code=A, Case Style=Molded, Manufacturer=Kemet, Operating Temp Range=-55Cto125C, Package / Case=3216-18, Package Description="2-Pin Surface Mount Device, Body 3.2 x 1.6 mm", Package Reference=1206, Tolerance (+ or -)=10%, Voltage=16VDC, Construction=SMTChip, Datasheet URL=http://www.farnell.com/datasheets/1824869.pdf, Datasheet Version=Apr-14, DCL=1.6uA, DF=8%, ESR=7ohm, Failure Rate=NotRequired, Insulation=NotRequired, Lead Spacing (nom)=NotRequiredmm, Length W/Weld=NotRequiredmm, Manufacturer URL=http://www.kemet.com/, Mounting Style=SurfaceMount, Packaging=TapeandReel, Polarity=Polar, Product Depth (mm)=1.6mm, Product Diameter (mm)=NotRequiredmm, Product Height (mm)=1.6mm, Product Length (mm)=3.2mm, Seal=NotRequired, Seated Plane Height=NotRequiredmm, Wire Form=NotRequired
C15: library part CMP-1035-02697-1, "CAP 470nF 10V ±20% 0603 (1608 Metric) Thickness 1mm SMD", Case-EIA=0603, Case-Metric=1608, Rated Voltage="10 V", Tolerance=Â±20%, Max Thickness="1 mm", Technology=SMT
C18: library part CMP-1035-02733-1, "CAP 1uF 10V ±10% 0603 (1608 Metric) Thickness 1mm SMD", Case-EIA=0603, Case-Metric=1608, Rated Voltage="10 V", Tolerance=Â±10%, Max Thickness="1 mm", Technology=SMT
C20 C21: library part CMP-1035-02741-1, "CAP 1uF 25V ±20% 0603 (1608 Metric) Thickness 1mm SMD", Case-EIA=0603, Case-Metric=1608, Rated Voltage="25 V", Tolerance=Â±20%, Max Thickness="1 mm", Technology=SMT
D1: library part CMP-2000-05191-1, "TVS Diode Array, 30 pF, 30 KV, -40 to 85 degC, 4-Pin SOT143, RoHS, Tape and Reel", Capacitance Value=30pF, Clamping Voltage=8V, Leakage Current=0.1uA, Manufacturer=Littelfuse, Operating Temp Range=-40Cto85C, Operating Temperature Classification=Industrial, Operating Temperature Max Deg. C=85C, Operating Temperature Min Deg. C=-40C, Package / Case=SOT-143, Reverse Stand-off Voltage=5.5(Min)V, Working Voltage=5.5V, Working Voltage (Max)=5.5V(Min), Clamping Voltage (Max)=8V, Configuration=Triple, Datasheet URL=https://datasheet.ciiva.com/15143/getdatasheetpartid-116020-15143550.pdf, Datasheet Version=Dec-13, Direction Type=Uni-Directional, Leakage Current (Max)=0.1uA, Manufacturer URL=http://www.littelfuse.com/, Mounting=SurfaceMount, Mounting Style=SurfaceMount, Number of Elements=3, Package Type=SOT-143, Packaging=TapeandReel, Pin Count=3+Tab, Polarity=Uni-Directional, Product Depth (mm)=1.4mm, Product Height (mm)=1.05mm, Product Length (mm)=3.04mm, Rad Hardened=No, Suppressor Type=TVS
D2: library part LED-RG-KAAK-4, "LED Indicator, Red / Green, 2 V, -40 to 100 degC, 4-Pin SMD, RoHS, Tape and Reel", Emitting Color=YellowGreen/Red, Forward Current=30mA, Forward Voltage=2.6V, Manufacturer=Dialight, Operating Temp Range=-55Cto100C, Operating Temperature Classification=Industrial, Package Description="4-Pin Surface Mount Device, Body 4.32 x 8.77 mm, Pitch 1.5 mm", Package Reference=591-3001-013F, Package Type=SMD, Power Dissipation=100W, Reverse Voltage=5V, Test Current (It)=20mA, Datasheet URL=https://datasheet.ciiva.com/2132/c17245-2132277.pdf, Datasheet Version="Rev. B, 10/2010", DELETED=Compliant, Dominant Wave Length=570/628nm, High Brightness=No, Lens Dimensions=2.8x2.8x2.7mm, Lens Type=NonDiffused, Lum Intensity=8/6.5mcd, Luminous Intensity=8/6.5mcd, Main Category=ChipLED, Manufacturer URL=http://www.dialight.com/, Mounting=SurfaceMount, Mounting Technology=SurfaceMount, Number of  Elements=2, Packaging=TapeandReel, Pin Count=2, Product Depth (mm)=8.8mm, Product Height (mm)=5mm, Product Length (mm)=4.3mm, Rad Hardened=No, Shape Type=Circular, Type=Bi-Color, Viewing Angle=40deg
FB1: library part CMP-0686-00574-2, "Chip Ferrite Bead for Power Lines, 60 Ohm, 500 mA, -55 to 125 degC, 1.6 x 0.8 x 0.95 mm SMD, Tape and Reel", DC Resistance="0.10 Ohm Max.", Manufacturer=Murata, Operating Temperature Range="-55 to 125 degC", Rated Current="500 mA", ComponentLink1Description="Manufacturer URL", ComponentLink1URL=http://www.murata.com/, ComponentLink2Description=Datasheet, ComponentLink2URL=http://www.murata.com/products/catalog/pdf/c31e.pdf, ComponentLink3Description="Package Specification", ComponentLink3URL=http://www.murata.com/products/catalog/pdf/c31e.pdf, DatasheetVersion=08/2013, Impedance (at 100 MHz)="60 Ohm Typ.", Mounting Technology="Surface Mount", PackageDescription="2-Pin Chip, Body 1.6 x 0.8 mm", PackageReference=BLM18_H950-2, Packing="Tape and Reel", PartNumber=BLM18PG600SN1J
J1: library part CMP-2000-05827-1, "Micro-USB B Receptacle, Right Angle, Bottom Mount, Surface Mount, with Solder Tabs, -30 to 85 degC, 5-Pin USB, RoHS, Tape and Reel", Manufacturer=Molex, Package Description="5-Leads USB, Micro B, Body 7.5 x 5 mm, Pitch 0.65 mm", Package Reference=MICRO-B, Package Version="Rev. F, 12/2012", Standard Package=1, Voltage - Max=30V, 3D Model=105017-0001.stp, Catalog Drawings=1050170001, Category=Connectors,Interconnects, Circuits=5, Connector Type=USB-microB, Datasheet URL=http://www.molex.com/elqNow/elqRedir.htm?ref=http://www.molex.com/webdocs/datasheets/pdf/en-us/1050170001_IO_CONNECTORS.pdf, Datasheet Version=03/2016, Family=USB,DVI,HDMIConnectors, Featured Product=Micro-USBConnectorsUSBConnectors, Features=Shielded,SolderRetention, Gender=Receptacle, Ingress Protection=-, Manufacturer URL=http://www.molex.com/, Mating Products=WM17145-ND-CABLEMICROUSBBTOSTDA1.0MWM17147-ND-CABLEMICROUSBBTOSTDA2.0MWM17146-ND-CABLEMICROUSBBTOSTDA1.5M, Mounting Technology=SurfaceMount, Mounting Type=BoardCutout,SurfaceMount,RightAngle, Number of Contacts=5, Online Catalog=Molex-MicroUSB, Other Names=WM1399DKR, Package URL=http://www.molex.com/pdm_docs/sd/1050170001_sd.pdf, Packaging=Digi-Reel®, PCN Assembly/Origin=ResinSupplier21/Oct/2015, RoHS Information=1050170001CertofCompliance, Series=-, Specifications=-
J2 J3: "Header, 6-Pin", LatestRevisionDate=17-Jul-2002, LatestRevisionNote="Re-released for DXP Platform.", Publisher="Altium Limited"
L1: library part CMP-05439-000009-1, "FIXED IND 2.2UH 5.8A 24.8 MOHM", Inductance=2.2uH, Manufacturer=Panasonic, Package=PCC-M0530M, Rms Current=4.8A, Saturation Current=10.9A, Series Resistance=24.8mΩ, Temperature="-40°C to +150°C", Temperature Range High=+150°C, Temperature Range Low=-40°C, Test Frequency=100kHz, Tolerance=20%, Automotive=Yes, Automotive Grade="Grade 0", Category=Ind, ComponentLink2Description=Datasheet, ComponentLink2URL=https://industrial.panasonic.com/cdbs/www-data/pdf/AGL0000/AGL0000C59.pdf, Core Material="Metal Composite", Device Class L1="Passive Components", Device Class L2=Inductors, Device Class L3="Fixed Inductors", Digikey Description="FIXED IND 2.2UH 5.8A 24.8 MOHM", Height=3mm, Lead Free=Yes, Manufacturer Part Number=ETQ-P3M2R2YFP, Octopart=https://octopart.com/etqp3m2r2yfp-panasonic-65686337, RoHS=TRUE, Shielding=true, Standoff Height=0.05mm
LED1 LED2 LED3 LED4: library part CMP-1426-00003-1, "SMD mono-color Chip LED, WL-SMCW, Blue", Color=Blue, Manufacturer="Wuerth Elektronik", ComponentLink1Description="Manufacturer URL", ComponentLink1URL=http://www.we-online.com, ComponentLink2Description=Datasheet, ComponentLink2URL=http://katalog.we-online.com/led/datasheet/150060BS75000.pdf, PackageReference=0603_A, PartNumber=150060BS75000
M1: library part CC1310-MOD
MOD1: library part TA3235S_MOD, "TA3235S Dual Band Wifi MOD"
P1: library part CMP-1676-00001-5, "Male Header, Pitch 2.54 mm, 1 x 3 Position, Height 8.38 mm, Tail Length 3.18 mm, RoHS, Bulk", Colour=Black, Current Rating="4 A", Manufacturer=Molex, Max Operating Temperature="75 degC", Min Operating Temperature="0 degC", Package Quantity=1, Voltage Rating="250 V", ComponentLink1Description="Manufacturer URL", ComponentLink1URL=http://www.molex.com/, ComponentLink2Description=Datasheet, ComponentLink2URL=http://www.molex.com/pdm_docs/sd/022284033_sd.pdf, Contact Finish=Gold, Contact Material=Brass, Contact Plating=Gold, DatasheetVersion="Rev. G, 01/2012", Height="8.38 mm", Lead Pitch="0.1 inch", Length="7.62 mm", Mount="Through Hole", Mounting Technology="Through Hole", PackageDescription="Male Header, Pitch 2.54 mm, 1 x 3 Position, Height 8.38 mm, Tail Length 3.18 mm", PackageReference=22-28-4033, Packaging=Bulk, Pins=3, REACH SVHC=Unknown, RoHSCompliant=true, Rows=1
P2: library part CMP-2000-05249-1, "Male Header, Pitch 1.25 mm, 1 x 5 Position, Height 3.4 mm, RoHS, Tape and Reel", Current Rating=1A, Manufacturer=Molex, Voltage Rating=125V, Brand=Molex, Contact Material=PhosphorBronze, Contact Plating=Tin, Datasheet URL=http://datasheet.octopart.com/532610571-Molex-datasheet-8343080.pdf, Datasheet Version="Rev. D, 04/2004", Factory Pack Quantity=1000, Housing Material=Thermoplastic, Manufacturer URL=http://www.molex.com/, Mounting Angle=Right, Mounting Style=SMD/SMT, Number of Positions=5, Number of Positions / Contacts=5, Number of Rows=1, Packaging=Reel, Pitch=1.25mm, Product Category=Headers&WireHousings, Product Type=Headers, RoHS=Details, Series=53261, Termination Style=SMD, Tradename=PicoBlade, Type=Shrouded
P3: "Header, 20-Pin, Dual row", LatestRevisionDate=17-Jul-2002, LatestRevisionNote="Re-released for DXP Platform.", Publisher="Altium Limited"
R1: library part CMP-1012-00779-1, "249K 0.1W 1% 0603 (1608 Metric)  SMD", Case-EIA=0603, Case-Metric=1608, Power="0.1 W", Tolerance="1 %", Technology=SMT
R2 R6: library part CMP-1012-00586-1, "4K7 0.1W 1% 0603 (1608 Metric)  SMD", Case-EIA=0603, Case-Metric=1608, Power="0.1 W", Tolerance="1 %", Technology=SMT
R3 R4 R5 R7 R8 R9 R11 R12 R13 R14: library part CMP-1012-00510-1, "1K 0.1W 1% 0603 (1608 Metric)  SMD", Case-EIA=0603, Case-Metric=1608, Power="0.1 W", Tolerance="1 %", Technology=SMT
R10 R15 R17 R18 R34: library part CMP-1012-00625-1, "10K5 0.1W 1% 0603 (1608 Metric)  SMD", Case-EIA=0603, Case-Metric=1608, Power="0.1 W", Tolerance="1 %", Technology=SMT
R16 R20 R21 R24: library part CMP-1012-00623-1, "10K 0.1W 1% 0603 (1608 Metric)  SMD", Case-EIA=0603, Case-Metric=1608, Power="0.1 W", Tolerance="1 %", Technology=SMT
R19: library part CMP-2003-04373-2, "RES 0.01 OHM 1% 1W 1206", Case Code (Imperial)=1206, Case Code (Metric)=3216, Max Operating Temperature=170°C, Max Power Dissipation=1W, Min Operating Temperature=-65°C, Package Quantity=1, Resistance=10mR, Resistance Tolerance=1%, Resistor Type="Metal Strip", Temperature Coefficient=75ppm/°C, Case/Package=1206, Construction=Rectangular, Contact Plating=Tin, Depth=1.6mm, Features="Moisture Resistant", Height=0.035inch, Lead Free="Lead Free", Length=3.2mm, Military Standard=Not, Mount="Surface Mount", Number of Pins=2, Number of Terminations=2, Packaging="Tape and Reel", Power Rating=1W, Radiation Hardening=No, RoHS Compliant=Yes, Series=WSLP, Size Code=1206, Termination=SMD/SMT, Tolerance=1%, Weight=0.000571oz, Width=0.063inch
R22 R23: library part CMP-1012-00001-1, "Jumper 0603 (1608 Metric)", Case-EIA=0603, Case-Metric=1608, Power=None, Technology=SMT, Tolerance=None
R25 R26 R27 R28 R29 R30 R31 R32 R33: library part CMP-1012-00397-1, "100R 0.1W 1% 0603 (1608 Metric)  SMD", Case-EIA=0603, Case-Metric=1608, Power="0.1 W", Tolerance="1 %", Technology=SMT
RF1: library part TG-RECE-20369-001E-01-4, "RF Connector, Onboard Receptacle, IPEX MHFIII", Housing Color=Gold, Manufacturer=Taoglas, ComponentLink1Description="Manufacturer URL", ComponentLink1URL=http://www.taoglas.com/, ComponentLink2Description=Datasheet, ComponentLink2URL=http://www.taoglas.com/images/product_images/original_images/RECE.20369.001E.01.pdf, ComponentLink3Description="Package Specification", ComponentLink3URL=http://www.taoglas.com/images/product_images/original_images/RECE.20369.001E.01.pdf, DatasheetVersion="Rev. C", Mounting Technology="Surface Mount", PackageDescription="4-Pin, Hand Drawn, Body 1.7x1.7mm", PackageReference=RECE-20369-001E-01-4, PackageVersion="Rev. C", Packing="Tape and Reel", PartNumber=RECE-20369-001E-01
SW1: library part CMP-05618-000102-1, "SWITCH TACTILE SPST-NO 0.05A 12V", Actuator Color=Black, Contact Current Rating=50mA, Contact Resistance=500mR, Max Operating Temperature=70°C, Max Voltage Rating (DC)=12V, Min Operating Temperature=-20°C, Operating Force=2.2N, Package Quantity=1, Actuator Length=0.65mm, Current Rating=50mA, Depth=3.55mm, Electrical Life=100000Cycles, Illumination Type=Non-Illuminated, Lead Free="Lead Free", Length=4.3mm, Max Current Rating=50mA, Mechanical Life=100000Cycles, Mount="Surface Mount", Orientation="Right Angle", Packaging="Tape and Reel", Radiation Hardening=No, REACH SVHC="No SVHC", Series=EVQP7, Size=2.9mm, Switch Function=Off-Mom, Switch Travel=0.2mm, Termination=J-Bend, Throw Configuration=SPST, Voltage Rating (DC)=12V
SW2 SW3: library part CMP-05618-000096-1, "SWITCH TACTILE SPST-NO 0.05A 12V", Case/Package=SMD/SMT, Contact Current Rating=50mA, Max Operating Temperature=70°C, Max Voltage Rating (DC)=12V, Min Operating Temperature=-20°C, Operating Force=2.2N, Package Quantity=5000, Actuator Length=1.7mm, Illumination Type=Non-Illuminated, Lead Free="Lead Free", Mechanical Life=100000Cycles, Mount="Surface Mount", Packaging="Tape and Reel", Radiation Hardening=No, Switch Function=Off-Mom, Switch Travel=0.2mm, Termination=J-Bend, Throw Configuration=SPST
U1: library part CMP-0395-00117-1, "Single Output Fast Transient Response LDO, 1 A, Fixed 3.3 V Output, 2.7 to 10 V Input, with Low IQ, 8-pin SOIC (D), -40 to 125 degC, Green (RoHS & no Sb/Br)", Manufacturer="Texas Instruments", Power Good=TRUE, Accuracy(%)=2, Code_JEDEC=MS-012, ComponentLink1Description="Manufacturer URL", ComponentLink1URL=http://www.ti.com/, ComponentLink2Description=Datasheet, ComponentLink2URL=http://www.ti.com/general/docs/lit/getliterature.tsp?genericPartNumber=TPS76833&fileType=pdf, ComponentLink3Description="Package Specification", ComponentLink3URL=http://www.ti.com/litv/pdf/msoi002j, DatasheetVersion=SLVS211L, Eco-Plan="Green (RoHS & no Sb/Br)", Fixed Output Options(V)=3.3, Iout(Max)(A)=1, Iq(Typ)(mA)=0.08, Mounting Technology="Surface Mount", PackageDescription="8-Pin Plastic Small Outline, Body 4.9 x 3.9 mm, Pitch 1.27 mm", PackageReference=D8, PackageVersion=4040047-3/M, PartNumber=TPS76833QDG4, SubFamily="Single Channel LDO", Vdo(Typ)(mV)=350, Vin(Max)(V)=10, Vin(Min)(V)=2.7, Vout Adj(Max)(V)=3.3, Vout Adj(Min)(V)=3.3
U2: "Imported", Alternate_PartNumber=BQ25895RTWT, Manufacturer="Texas Instruments", CompType=IC, MountType=SMT, PackageReference=RTW0024H, PartNumber=BQ25895RTWR, PIN_COUNT=25, RefDes=RefDes, Type=TYPE
U3: library part SLAB-CP2102N-QFN-24, "USBXpress(TM) Family, 4 GPIOs, 2.2 to 3.6 V, -40 to 85 degC, 24-Pin QFN, RoHS", Case\/Package=QFN, Manufacturer="Silicon Labs", Max Operating Temperature=85degC, Max Supply Voltage=3.6V, Min Operating Temperature=-40degC, Min Supply Voltage=3V, Package Description="24-Pin Quad Flat No-lead Package, Body 4 x 4 mm, Pitch 0.5 mm", Package Reference=QFN-24-2550x2550TP_A, Datasheet URL=http://www.silabs.com/documents/public/data-sheets/cp2102n-datasheet.pdf, Datasheet Version="Rev. 1.1, 08/2016", Manufacturer URL=http://www.silabs.com/, Mounting Technology=SurfaceMount, Number of Pins=24, REACH SVHC=Unknown, RoHSCompliant=False
U4: library part CMP-04892-000009-1, "IC USB SW/MHL DPDT 10UQFN", Ambient Temperature Range High=+85°C, Ambient Temperature Range Low=-40°C, Manufacturer="Texas Instruments", Max Supply Voltage=4.8V, Min Supply Voltage=2.3V, Nominal Supply Current=30uA, On State Resistance=5.7Ω, Package=UQFN10, Temperature="-40°C to +85°C", -3Db Bandwith=6.1GHz, Automotive=No, Category=IC, ComponentLink2Description=Datasheet, ComponentLink2URL=http://www.ti.com/lit/ds/symlink/ts3usb3000.pdf, Device Class L1="Integrated Circuits (ICs)", Device Class L2="Interface ICs", Device Class L3="Analog Switches", Digikey Description="IC USB SW/MHL DPDT 10UQFN", Height=0.6mm, Interface=USB, Ipc Land Pattern Name=QFN50P150X200X55-10, Lead Free=Yes, Manufacturer Part Number=TS3USB3000RSER, Mouser Description="DPDT USB 2.0 High-Speed and Mobile High-Definition Link (MHL) (6.1GHz) Switch 10-UQFN -40 to 85", Number Of Circuits=2, Octopart=https://octopart.com/ts3usb3000rser-texas+instruments-25746917, RoHS=TRUE, Standoff Height=0mm, Temperature Range High=+85°C, Temperature Range Low=-40°C, Throw Configuration=DPDT
U5: library part 0f562f18464a1f07b55dcd927f1fdf2, "IC BATT FUEL GAUGE LI-ION 12SON", Ambient Temperature Range High=+85°C, Ambient Temperature Range Low=-40°C, Manufacturer="Texas Instruments", Max Supply Voltage=4.5V, Min Supply Voltage=2.45V, Nominal Supply Current=93uA, Output Voltage=1.8V, Package=DRZ0012A, Temperature="-40°C to +85°C", Automotive=No, Category=IC, ComponentLink2Description=Datasheet, ComponentLink2URL=http://www.ti.com/lit/gpn/bq27441-g1, Device Class L1="Integrated Circuits (ICs)", Device Class L2="Power Management ICs", Device Class L3="Battery Management", Digikey Description="IC BATT FUEL GAUGE LI-ION 12SON", Height=1mm, Lead Free=Yes, Manufacturer Part Number=BQ27441DRZR-G1A, Mouser Description="System-Side Impedance Track? Battery Fuel (Gas) Gauge 12-SON -40 to 85", Number Of Cells=1, Number Of Outputs=1, Octopart=https://octopart.com/bq27441drzr-g1a-texas+instruments-30555829, RoHS=TRUE, Standoff Height=0mm, Temperature Range High=+85°C, Temperature Range Low=-40°C
U6: library part CMP-0859-00115-3, "Single 2-Input Positive-OR Gate, DBV0005A, LARGE T&R", F @ Nom Voltage(Max)(Mhz)=75, Generic Part Number=SN74AHC1G32, ICC @ Nom Voltage(Max)(mA)=0.01, Manufacturer="Texas Instruments", Operating Temperature Range(C)="-40 to 125", Rating=Catalog, tpd @ Nom Voltage(Max)(ns)=13,8.5, Voltage(Nom)(V)=3.3,5, 3-State Output=No, Bits(#)=1, DatasheetVersion=SCLS317O, Gate Type=OR, Input Type=CMOS, Logic=True, Output Drive (IOL/IOH)(Max)(mA)=50/-50, Output Type=CMOS, PackageReference=DBV0005A, Schmitt Trigger=No, Sub-Family="OR Gate", Technology Family=AHC, VCC(Max)(V)=5.5, VCC(Min)(V)=2

## Via types
v1: diameter 0.4, hole 0.2, Top Layer to Bottom Layer, 215 vias
v2: diameter 0.5, hole 0.3, Top Layer to Bottom Layer, 11 vias
v3: diameter 4, hole 2, Top Layer to Bottom Layer, 3 vias
v4: diameter 2, hole 1.5, Top Layer to Bottom Layer, 1 vias
v5: diameter 1.2, hole 0.9, Top Layer to Bottom Layer, 1 vias
v6: diameter 1.5, hole 1.3, Top Layer to Bottom Layer, 1 vias

## Nets (pads, with @x,y where several pads share a name; then routed paths per layer and width w, separated by ;. In a path a pad name is that pad's centre, name@x,y a point inside that pad or via, vN(x,y) a via of type N, cw(c..) or ccw(c..) an arc to the next point about the centre after c; other vN are vias at no path point)
3.3VD: C3.2 C4.2 C6.2 C7.2 C19.2 J3.6 M1.12 MOD1.15 MOD1.16 P1.3 P2.5 P3.2 P3.4 P4.1 P4.2 R1.2 R2.1 R5.2 R6.1 R7.1 R8.1 R9.2 R16.1 R20.2 R24.2 U1.5 U1.6 U6.5 | length 16.6
  Top Layer w0.508: R8.1@1,3.645 1.016,3.629 v1(1.016,2.794) ; R7.1@1,7.963 1.016,7.947 v1(1.016,7.112) ; R9.2@1,26.073 1.038,26.035 v1(1.524,26.035) ; R2.1@25.908,25.997 25.958,25.997 26.846,26.885 v1(27.025,26.885) ; v1@27.025,26.797 27.293,26.797 28.144,27.648 R6.1@28.194,27.648 ; R20.2@27.432,8.979 27.468,8.943 v1(27.468,8.177) ; R16.1@29.172,47.371 v1(30.607,47.371) ; v1(47.879,43.18) R24.2@48.857,43.18 ; 54.102,10.033 v1(54.102,10.668) M1.12@54.102,8.128 54.177,8.053 54.177,6.313 C6.2@54.267,6.223 ; R5.2@58.839,50.292 v1(60.833,50.292) ; P2.5@60.706,33.274 v1(60.706,34.29)
  other v1: 26.348,6.01 11.049,6.096 11.684,6.096 18.034,11.049 18.669,11.049 21.59,19.304 22.606,19.304 22.606,20.701 21.575,20.727 51.356,28.826 51.331,29.483
  other v2: 44.577,46.482 44.6,47.2
BATT_Gau_OUT: C14.1 R19.2 U2.13 U2.14 U5.7 | length 3.5
  Top Layer w0.2: R19.2@23.497,42.164 24.082,42.749 24.082,43.132 25.035,44.085 U5.7@25.035,45.005
  other v1: 20.695,29.284 20.092,29.303 20.193,38.481 20.843,38.483 20.193,39.116 20.828,39.116
BATT_IN: BT1.1 C18.2 R19.1 U5.6 U5.8 | length 12.1
  Top Layer w0.2: 20.574,43.18 20.574,44.411 22.587,46.424 22.587,46.724 22.987,47.124 22.987,47.879 24.073,48.965 U5.6@25.035,48.965 ; U5.8@25.435,45.005 25.434,45.003 25.434,44.162 26.324,43.272 26.324,42.849 27.054,42.119 ; R19.1@26.287,42.164 R19.1@26.543,42.42
  other v1: 18.923,41.783 19.812,41.783 26.924,41.783 27.536,41.771 18.923,42.545 19.812,42.545 26.924,42.545 27.559,42.545